# Altium PCB PCB-SMD_2025-10-18.pcbdoc
Units mm, origin at the board's own origin, x right, y up, seen from the top; angles counter-clockwise.
Board outline 68.43 x 81.53 mm, 2 copper layers (Top Layer, Bottom Layer); 25 components, 43 nets, 85 pads, 14 vias.
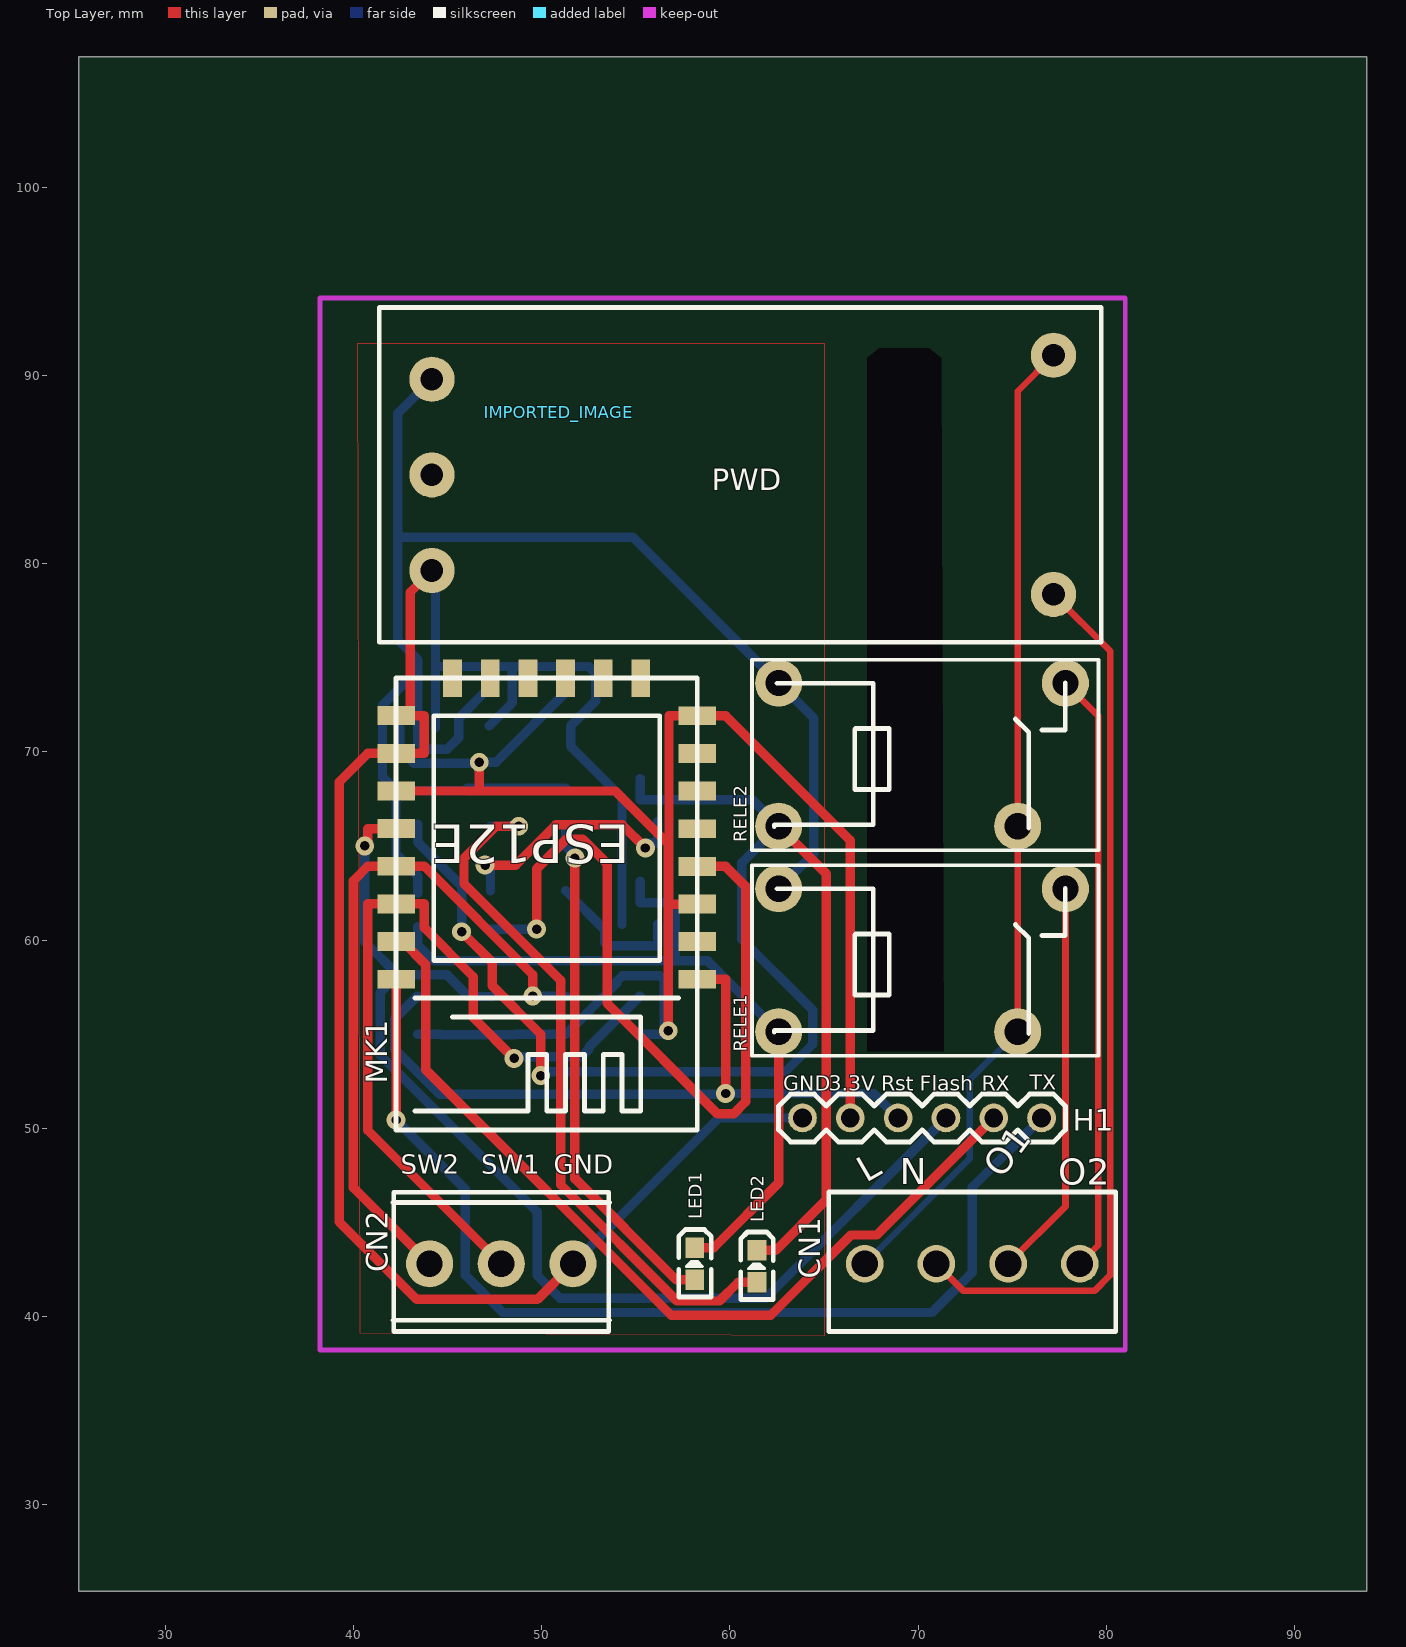
[diagram p0: Top Layer view]
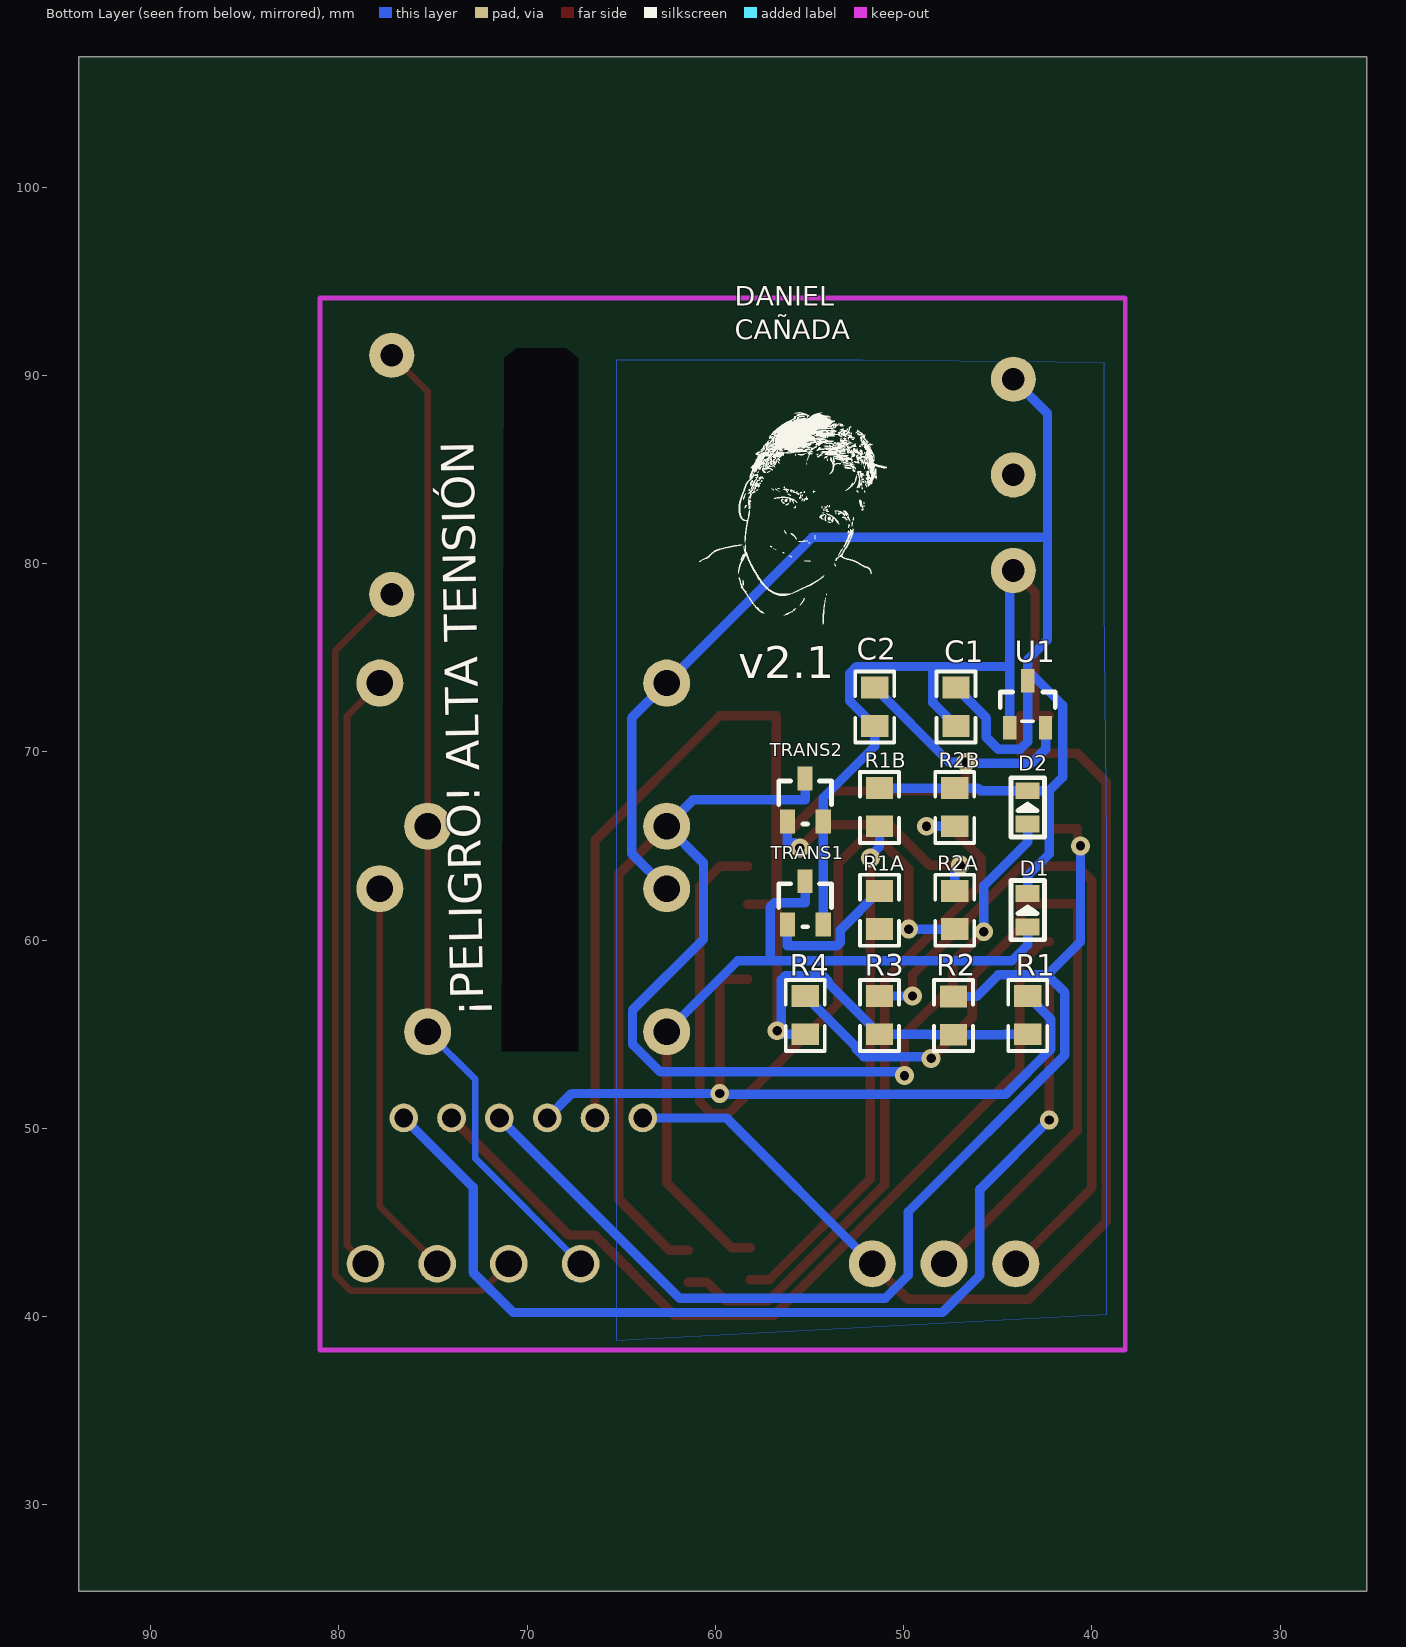
[diagram p1: Bottom Layer view, seen from below]

## Layer stack, top to bottom
Top Layer: signal copper (thickness not stored)
Dielectric: dielectric 0.32, FR-4, Dk 4.8
Bottom Layer: signal copper (thickness not stored)

## Board outline
93.828,25.4 25.4,25.4 25.4,106.934 93.828,106.934
cut-out: 67.285,90.937 67.92,91.445 70.587,91.445 71.222,90.937 71.349,54.107 70.333,54.107 69.19,54.107 68.301,54.107 67.285,54.107

## Components (designator, comment, footprint, x,y, rotation, side; value= is the part's Value field where it differs from the comment)
C1 "47uF" 0805#1 47.219,72.395 r270 bottom
C2 "47uF" 0805#1 51.537,72.395 r270 bottom
CN1 "EK381V-04P" DIP-15.24X7.4-1X4P-3.81MM 72.873,42.804 r0 top
CN2 "EK381V-03P" EK381V-03P 47.854,42.804 r0 top
D1 "CD4148WSP" D0805 43.409,61.589 r270 bottom
D2 "CD4148WSP" D0805 43.409,67.05 r270 bottom
H1 "68000-406HLF" 68000-406HLF 70.206,50.551 r0 top
IMPORTED_IMAGE "IMPORTED_IMAGE" IMPORTED_IMAGE 50.919,88.04 r0 top
LED1 "FC-D1608HYK-588J" LED-0603 58.141,42.804 r270 top
LED2 "FC-D1608HYK-588J" LED-0603 61.443,42.677 r270 top
MK1 "ESP-12E" ESP-12E 50.267,65.918 r180 top
PWD "WA3-220S05A3" WA3-220S05A3 60.681,84.714 r180 top
R1 "10K" 0805#1 43.409,56.012 r270 bottom
R1A "330" 0805#2 51.283,61.6 r270 bottom
R1B "160" 0805#2 51.283,67.061 r270 bottom
R2 "10K" 0805#1 47.346,55.989 r90 bottom
R2A "330" 0805#2 47.283,61.6 r270 bottom
R2B "160" 0805#2 47.283,67.061 r270 bottom
R3 "10K" 0805#1 51.283,56.012 r270 bottom
R4 "10K" 0805#1 55.22,56.012 r270 bottom
RELE1 "JZC-32F/005-HS3(555)" RELAY-HF_34 70.206,58.933 r0 top
RELE2 "JZC-32F/005-HS3(555)" RELAY-HF_34 70.206,69.855 r0 top
TRANS1 "S8050-J3Y" SOT-23 55.22,61.981 r0 bottom
TRANS2 "S8050-J3Y" SOT-23 55.22,67.442 r0 bottom
U1 "AIC1748-33GU3TR" SOT-23-3 43.409,72.522 r0 bottom

## Footprints (in the part's own frame and the unit in brackets; to place one, negate y for a bottom-side part, rotate by r counter-clockwise, add the part's x,y. Pads: shape width x height; smd on the part's side, far side on the other; paste and mask are expansions set on the pad)
0805#1 [mm]
  rect 1.16x1.45 smd paste+0 mask+0.102: 1(1.016,0) 2(-1.016,0)
  silkscreen extent -1.87,-1.04 1.9,1.03
0805#2 [mm]
  rect 1.16x1.45 smd paste+0 mask+0.102: 1(1.016,0.001) 2(-1.016,0.001)
  silkscreen extent -1.87,-1.04 1.9,1.03
68000-406HLF [mil]
  round 60 hole 39.37 paste+0 mask+4: 1(-250,0) 2(-150,0) 3(-50,0) 4(50,0) 5(150,0) 6(250,0)
  silkscreen extent -300,-50 300,50
D0805 [mil]
  rect 35x50 smd paste+0 mask+4: 1(34.96,0) 2(-35.04,0)
  silkscreen extent -62,-35 62,35
DIP-15.24X7.4-1X4P-3.81MM [mm]
  round 2 hole 1.4 paste+0 mask+0.102: 1(-5.715,0) 2(-1.905,0) 3(1.905,0) 4(5.715,0)
  silkscreen extent -7.62,-3.6 7.62,3.81
EK381V-03P [mm]
  round 2.5 hole 1.4 paste+0 mask+0.102: 1(-3.81,0) 2(0,0) 3(3.81,0)
  silkscreen extent -5.75,-3.6 5.75,3.8
ESP-12E [mm]
  rect 2x1 smd paste+0 mask+0.102: 1(-8.002,8.001) 2(-8.002,6.001) 3(-8.002,4.002) 4(-8.002,2.002) 5(-8.002,0) 6(-8.002,-1.999) 7(-8.002,-3.998) 8(-8.001,-5.999) 15(7.998,-6.005) 16(8,-4) 17(8.001,-2.003) 18(8.001,-0.003) 19(8,1.999) 20(8.001,3.998) 21(8,5.998) 22(8.001,7.998)
  rect 1x2 smd paste+0 mask+0.102: 9(-5,-8) 10(-3.002,-7.998) 11(-1.003,-8) 12(0.998,-8) 13(2.997,-8) 14(4.996,-8)
  silkscreen extent -8,-8 8,16
IMPORTED_IMAGE [mm]
LED-0603 [mil]
  rect 43x39 smd paste+0 mask+4: 1(33.5,0) 2(-33.5,0)
  silkscreen extent -72,-34 70,34
RELAY-HF_34 [mm]
  round 2.5 hole 1.4 paste+0 mask+0.102: 1(-7.62,-3.8) 2(-7.62,3.8) 3(7.62,3.8) 4(5.08,-3.8)
  silkscreen extent -9.03,-5.08 9.37,5.04
SOT-23 [mil]
  rect 31.89x50 smd paste+0 mask+4: 1(37.5,45) 2(-37.5,45) 3(0.5,-45)
  silkscreen extent -54,-40 56,50
SOT-23-3 [mm]
  rect 0.7x1.25 smd paste+0 mask+0.102: 1(0.95,1.25) 2(-0.95,1.25) 3(0,-1.25)
  silkscreen extent -1.46,-0.65 1.46,0.9
WA3-220S05A3 [mm]
  round 2.4 hole 1.2 paste+0 mask+0.102: 1(-16.51,6.35) 2(-16.51,-6.35) 3(16.51,-5.08) 4(16.51,0) 5(16.51,5.08)
  silkscreen extent -19.05,-8.89 19.3,8.89

## Via types
v1: diameter 1, hole 0.5, Top Layer to Bottom Layer, tented both sides, 14 vias

## Nets (pads, with @x,y where several pads share a name; then routed paths per layer and width w, separated by ;. In a path a pad name is that pad's centre, name@x,y a point inside that pad or via, vN(x,y) a via of type N, cw(c..) or ccw(c..) an arc to the next point about the centre after c; other vN are vias at no path point)
+3.3V: C2.2 H1.2 MK1.3 MK1.8 MK1.17 R1.1 R2.2 R3.1 R4.1 U1.2 | length 96.8
  Top Layer w0.5: MK1.17 46.686,67.919 ; v1(46.686,69.451) 46.686,67.919 ; v1(56.721,55.184) 56.721,61.915 ; MK1.3 56.764,61.915 ; H1.2 66.396,65.293 59.772,71.917 MK1.8 57.516,71.917 56.764,71.917 56.764,61.915 ; 46.686,67.919 53.904,67.919 56.721,65.103 56.721,61.915 ; 56.721,61.915 56.764,61.915
  Bottom Layer w0.5: U1.2 42.459,70.144 43.213,69.393 46.625,69.393 v1(46.686,69.451) 47.577,69.451 C2.2 ; R1.1 44.636,54.996 44.659,54.973 R2.2 48.575,54.973 48.598,54.996 R3.1 53.993,57.706 53.993,57.815 54.288,58.11 56.284,58.11 56.503,57.889 v1@56.503,55.184 ; R4.1 56.449,54.996 56.449,55.13 v1@56.503,55.184 ; v1(56.721,55.184) v1@56.503,55.184
+5V: C1.2 D1.2 D2.2 PWD.3 R1B.2 R2B.2 RELE1.2 RELE2.2 U1.3 | length 84.8
  Bottom Layer w0.5: D1.2 43.409,63.426 42.261,64.574 42.261,67.94 ; PWD.3 42.355,87.978 42.355,81.397 ; C1.2 45.604,71.795 45.604,70.764 44.984,70.144 43.8,70.144 43.409,70.536 43.409,72.644 U1.3 U1.3@43.409,74.335 ; R1B.2 R2B.2 46.053,68.077 45.916,67.94 D2.2 42.261,67.94 ; RELE1.2 64.45,64.597 64.45,71.79 RELE2.2 54.844,81.397 42.355,81.397 ; 42.261,67.94 41.545,68.656 41.545,72.471 U1.3@43.409,74.335 ; 42.355,81.397 42.355,75.953 43.409,74.899 U1.3@43.409,74.335
FLASH: H1.4 MK1.18 R2.1 | length 61.5
  Top Layer w0.5: v1(40.602,65.001) 40.762,65.161 40.762,65.92 MK1.18
  Bottom Layer w0.5: v1(40.602,65.001) 40.602,59.911 42.365,58.148 ; R2.1 46.119,57.005 44.976,58.148 42.365,58.148 ; H1.4 61.903,40.978 50.973,40.978 49.759,42.192 49.759,45.567 41.43,53.896 41.43,57.213 42.365,58.148
GND: C1.1 C2.1 CN2.3 H1.1 MK1.15 MK1.16 PWD.5 TRANS1.2 TRANS2.2 U1.1 | length 106.3
  Top Layer w0.5: MK1.15 MK1.15@43.02,71.922 ; PWD.5 43.02,78.483 MK1.15@43.02,71.922 ; CN2.3 49.774,40.912 43.363,40.912 39.246,45.029 39.246,68.399 40.765,69.918 MK1.16 43.77,69.918 43.772,69.921 43.772,71.922 MK1.15@43.02,71.922
  Bottom Layer w0.5: PWD.5 44.359,79.446 44.359,74.536 ; U1.1 44.359,74.536 ; C1.1 48.446,72.606 48.446,74.536 ; CN2.3 59.411,50.551 H1.1 ; TRANS1.2 TRANS2.2 54.268,67.566 51.537,70.297 C2.1 52.865,72.707 52.865,74.17 52.5,74.536 48.446,74.536 ; 44.359,74.536 48.446,74.536
L: CN1.1 PWD.2 RELE1.4 RELE2.4 | length 52.4
  Top Layer w0.35: RELE1.4 RELE2.4 75.286,89.159 PWD.2
  Bottom Layer w0.35: CN1.1 72.746,48.392 72.746,52.593 RELE1.4
LED1_1: LED1.1 R1B.1 | length 27.5
  Top Layer w0.5: v1(51.763,64.358) 51.763,47.333 57.143,41.953 LED1.1
  Bottom Layer w0.5: R1B.1 51.283,64.963 51.763,64.483 v1(51.763,64.358)
LED1_2: D1.1 LED1.2 RELE1.1 TRANS1.3 | length 41.9
  Top Layer w0.5: LED1.2 59.139,43.655 62.586,47.102 RELE1.1
  Bottom Layer w0.5: D1.1 43.409,59.753 44.257,58.905 57.095,58.905 ; TRANS1.3 55.233,61.986 56.861,61.986 57.095,61.755 57.095,58.905 ; RELE1.1 58.814,58.905 57.095,58.905
LED2_1: LED2.1 R2B.1 | length 38
  Top Layer w0.5: v1(48.786,66.045) 47.577,66.045 45.875,64.343 45.875,62.994 51.011,57.858 51.011,47.008 57.191,40.828 59.449,40.828 60.445,41.826 LED2.1
  Bottom Layer w0.5: R2B.1 48.509,66.045 v1(48.786,66.045)
LED2_2: D2.1 LED2.2 RELE2.1 TRANS2.3 | length 79.9
  Top Layer w0.5: v1(45.746,60.447) 47.384,58.808 47.384,57.569 49.952,55.001 v1(49.952,52.804) ; LED2.2 62.441,43.528 65.126,46.213 65.126,63.515 RELE2.1
  Bottom Layer w0.5: D2.1 43.409,65.214 45.746,62.877 v1(45.746,60.447) ; v1(49.952,52.804) 50.153,53.005 62.937,53.005 64.402,54.47 64.402,56.279 60.633,60.048 60.633,64.102 RELE2.1 61.194,67.447 55.233,67.447 55.233,68.016 TRANS2.3
LINLUZ1: CN1.3 RELE1.3 | length 21.2
  Top Layer w0.35: CN1.3 77.826,45.852 RELE1.3
LINLUZ2: CN1.4 RELE2.3 | length 32
  Top Layer w0.35: RELE2.3 79.568,71.912 79.568,43.784 CN1.4
MK1_2: MK1.2
MK1_6: MK1.6
MK1_7: MK1.7
MK1_9: MK1.9
MK1_10: MK1.10
MK1_11: MK1.11
MK1_12: MK1.12
MK1_13: MK1.13
MK1_14: MK1.14
N: CN1.2 PWD.1 | length 47.6
  Top Layer w0.35: CN1.2 72.411,41.361 79.36,41.361 80.203,42.204 80.203,75.351 PWD.1
PWD_4: PWD.4
R1A_1: MK1.5 R1A.1
R2A_1: MK1.4 R2A.1 | length 42.5
  Top Layer w0.5: v1(49.731,60.584) 49.731,63.777 51.321,65.367 52.175,65.367 53.475,64.069 53.475,56.642 59.348,50.769 60.191,50.769 60.833,51.412 60.833,62.855 59.772,63.916 MK1.4
  Bottom Layer w0.5: R2A.1 v1(49.731,60.584)
RESET: H1.3 MK1.1 R1.2 | length 39.2
  Top Layer w0.5: MK1.1 59.772,57.917 v1(59.772,51.851)
  Bottom Layer w0.5: R1.2 42.182,55.801 42.182,54.208 44.59,51.801 59.723,51.801 v1(59.772,51.851) 67.636,51.851 H1.3
RX: H1.5 MK1.21 | length 47.6
  Top Layer w0.5: MK1.21 42.617,59.918 43.836,58.702 43.836,53.119 56.884,40.071 62.164,40.071 66.429,44.335 67.801,44.335 H1.5
S$17: 
S$18: 
S$19: 
S$20: 
S$21: 
S$23: 
S$36: 
S$38: 
S$150: 
S$152: 
S$236: 
S$240: 
SWITCH1: CN2.1 MK1.19 R3.2 | length 37.1
  Top Layer w0.5: CN2.1 40,46.848 40,63.154 40.765,63.919 41.517,63.919 MK1.19 43.77,63.919 49.528,58.161 v1(49.528,57.028)
  Bottom Layer w0.5: v1(49.528,57.028) R3.2
SWITCH2: CN2.2 MK1.20 R4.2 | length 43.4
  Top Layer w0.5: CN2.2 40.762,49.896 40.762,61.92 MK1.20 43.77,61.92 43.77,60.652 46.363,58.057 46.363,55.887 v1(48.537,53.713)
  Bottom Layer w0.5: v1(48.537,53.713) 48.631,53.807 52.111,53.807 52.512,54.206 52.512,54.318 R4.2
TRANS1_1: R1A.2 TRANS1.1 | length 7.6
  Bottom Layer w0.5: R1A.2 53.361,60.536 53.361,59.865 53.526,59.7 56.173,59.7 TRANS1.1
TRANS2_1: R2A.2 TRANS2.1 | length 13.3
  Top Layer w0.5: v1(46.993,63.985) 48.621,63.985 50.757,66.119 54.285,66.119 v1(55.512,64.894)
  Bottom Layer w0.5: v1(46.993,63.985) 47.283,63.698 R2A.2 ; v1(55.512,64.894) 55.779,65.161 56.173,65.161 TRANS2.1
TX: H1.6 MK1.22 | length 55.6
  Top Layer w0.5: v1(42.266,50.442) MK1.22
  Bottom Layer w0.5: v1(42.266,50.442) 45.949,46.759 45.949,42.197 47.933,40.216 70.742,40.216 72.873,42.344 72.873,46.868 H1.6

## Polygon pours and split planes (outlines as drawn)
GND on Bottom Layer (solid): 39.345,90.683 52.172,90.81 65.253,90.81 65.253,38.74 39.218,40.137 39.218,65.283 39.345,77.983
GND on Top Layer (solid): 40.234,91.699 64.999,91.699 64.999,38.994 40.361,39.121

## Silkscreen, mask and mechanical layers (free items; w line width, h text height)
Top Overlay:
  text "TX" at 75.921,52.056 h0.8
  text "GND" at 62.84,52 h0.8
  text "3.3V" at 65.253,52 h0.8
  text "Rst" at 68.047,52 h0.8
  text "Flash" at 70.079,52 h0.8
  text "RX" at 73.381,52 h0.8
  text "N" at 70.46,48.401 h1.4 r180
  text "SW2" at 42.52,47.574 h1
  text "SW1" at 46.788,47.574 h1
  text "GND" at 50.648,47.574 h1
  text "O1" at 74.448,47.28 h1.4 r53
  text "L" at 67.254,47.095 h1.4 r30
  text "O2" at 77.445,47.001 h1.4
Bottom Overlay:
  text "DANIEL / CAÑADA" at 58.967,91.585 h1.78
  text "v2.1" at 58.776,73.902 h1.7
  text "¡PELIGRO! ALTA TENSIÓN" at 71.727,55.918 h3 r269
Document:
  lines w0.003: 59.614,66.167 59.614,66.167

## Text inside footprints (layer, text, board x,y; h text height)
MK1: Top Overlay "ESP12E" at 54.669,66.134 h2.03 r180